# Altium PCB XRACER-R07.pcbdoc (part 2 of 2)
Units mm, origin at the board's own origin, x right, y up, seen from the top; angles counter-clockwise.
Board outline 50.7 x 52.3 mm, 4 copper layers (Top Layer, 2, 3, Bottom Layer); 135 components, 122 nets, 557 pads, 407 vias.
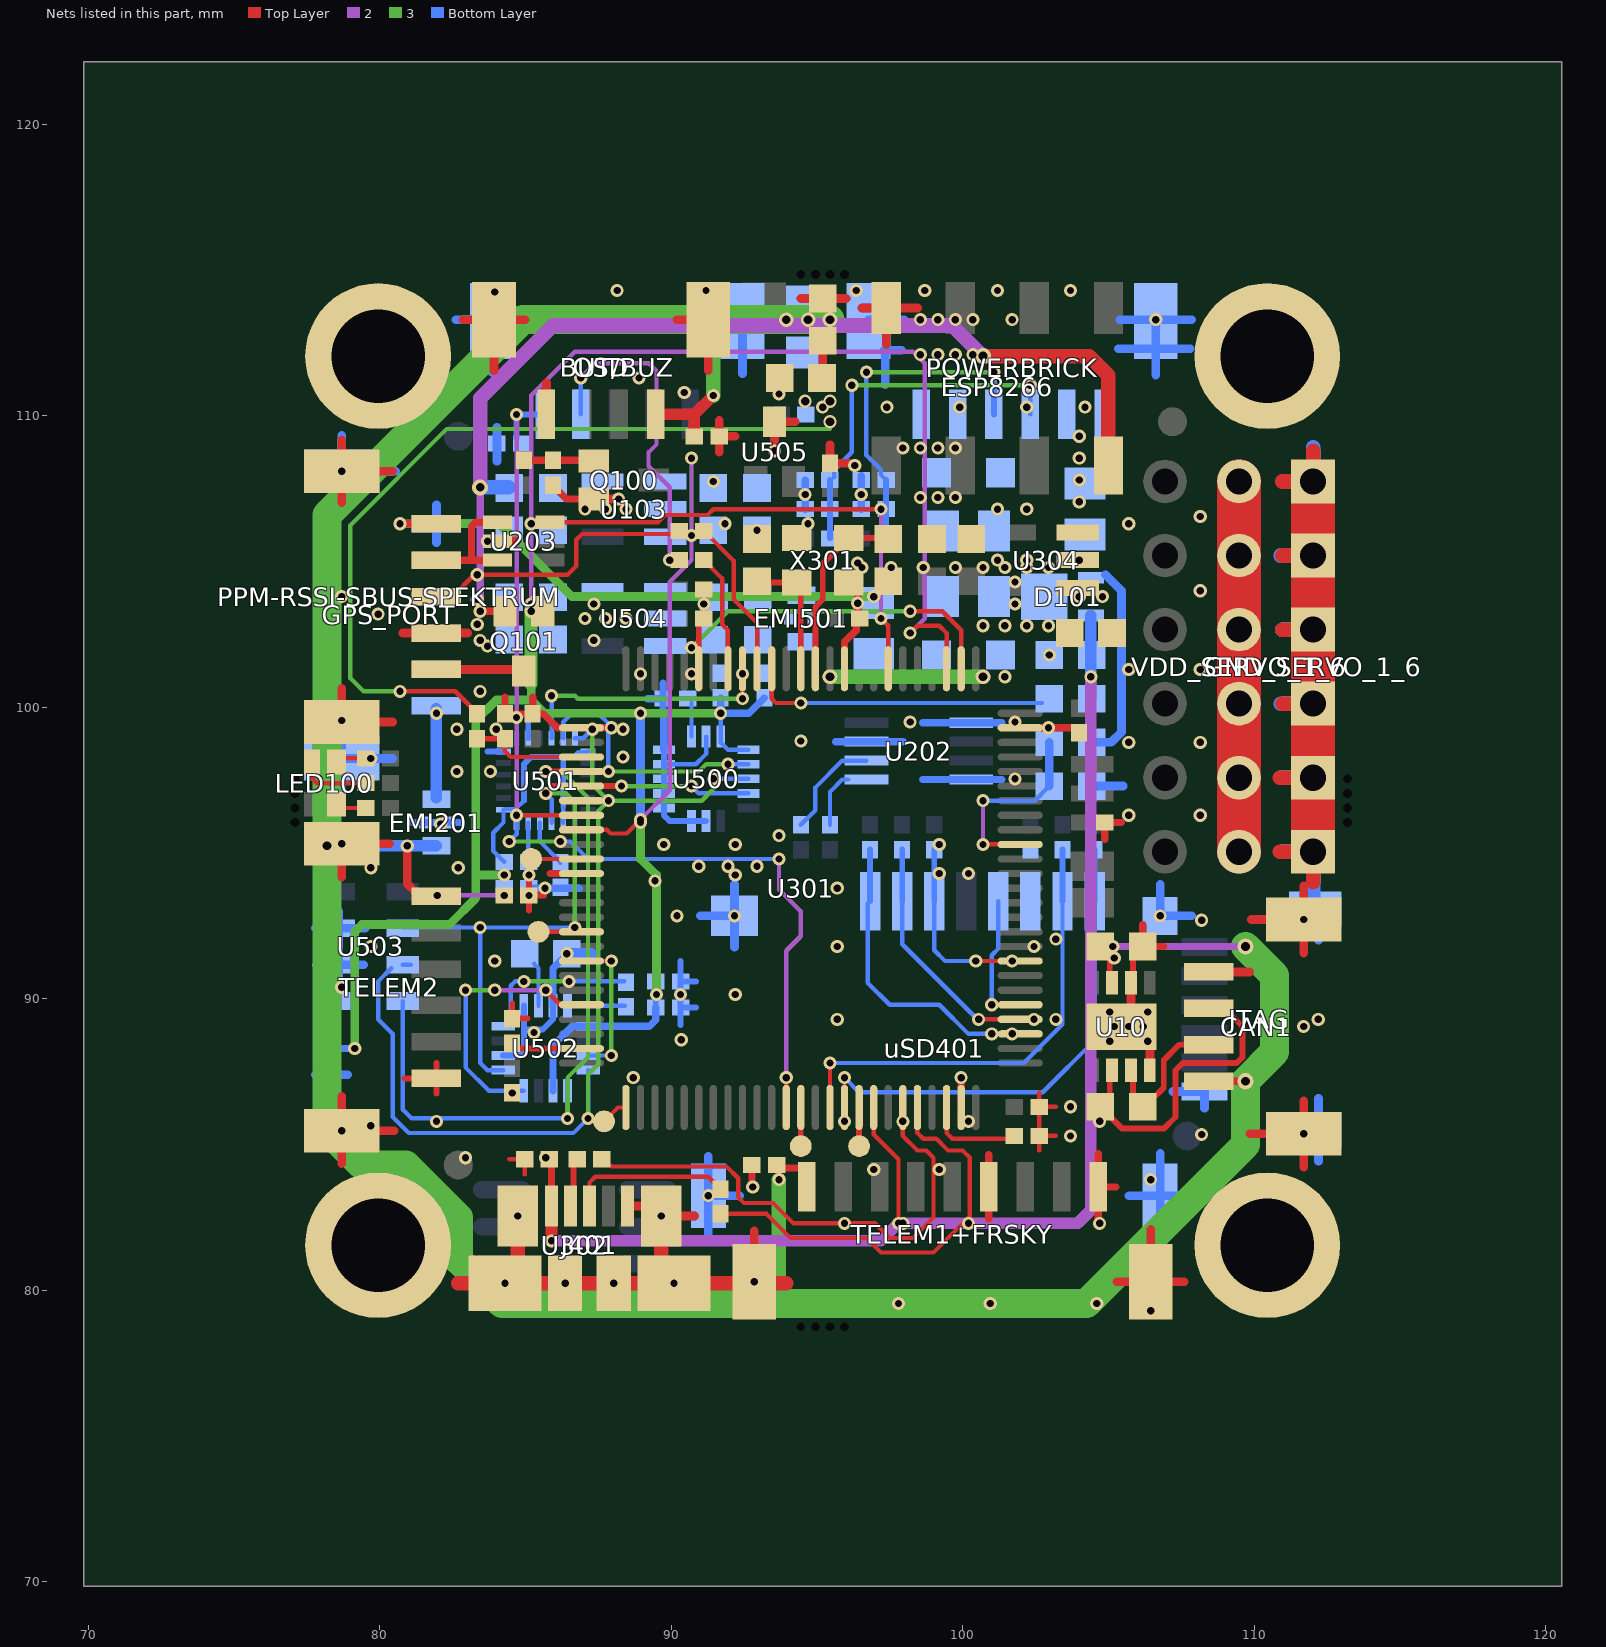
[diagram p4: the nets of this part, all layers, seen from the top]

## Via types
v1: diameter 0.45, hole 0.25, Top Layer to Bottom Layer, 394 vias
v2: diameter 0.5, hole 0.3, Top Layer to Bottom Layer, 5 vias
v3: diameter 0.55, hole 0.3, Top Layer to Bottom Layer, 5 vias
v4: diameter 0.45, hole 0.3, Top Layer to Bottom Layer, 3 vias

## Nets (pads, with @x,y where several pads share a name; then routed paths per layer and width w, separated by ;. In a path a pad name is that pad's centre, name@x,y a point inside that pad or via, vN(x,y) a via of type N, cw(c..) or ccw(c..) an arc to the next point about the centre after c; other vN are vias at no path point) (continued)
GND: BUT/BUZ.GND C103.1 C105.1 C118.1 C119.1 C120.1 C301.1 C302.1 C303.1 C304.2 C305.2 C310.1 C311.1 C312.1 C313.1 C314.1 C315.1 C316.1 C317.1 C318.1 C319.1 C401.1 C402.2 C403.2 C404.1 C405.2 C501.1 C502.1 C503.1 C505.1 C508.1 C509.1 C510.1 C511.1 C520.1 C521.1 C523.1 C524.1 C525.1 C526.1 C601.2 C602.2 C603.2 CAN1.4 CAN1.GND EMI201.3 EMI201.4 EMI501.3 EMI501.4 ESP8266.2 G1.1 G2.1 G3.1 G4.1 GND_SERVO_1_6.1 GND_SERVO_1_6.2 GND_SERVO_1_6.3 GND_SERVO_1_6.4 GND_SERVO_1_6.5 GND_SERVO_1_6.6 GPS_PORT.6 GPS_PORT.GND J401.5 J401.6 J401.7 JTAG.6 JTAG.GND OSD.4 OSD.GND POWERBRICK.1 POWERBRICK.2 POWERBRICK.GND PPM-RSSI-SBUS-SPEKTRUM.4 PPM-RSSI-SBUS-SPEKTRUM.GND Q100.2 R104.1 R105.2 R131.2 R140.1 R301.2 R404.2 R407.2 R408.2 R431.2 TELEM1+FRSKY.6 TELEM1+FRSKY.9 TELEM1+FRSKY.GND TELEM2.6 TELEM2.GND TVS103.1 U10.2 U10.8 U10.EP U103.2 U202.1 U202.4 U202.7 U203.2 U301.10 U301.20 U301.27 U301.37 U301.74 U301.99 U302.4 U304.2 U500.7 U500.8 U500.9 U500.10 U500.11 U500.12 U500.13 U500.15 U501.11 U501.18 U501.20 U502.6 U502.9 U502.11 U503.2 U503.3 U504.2 U505.3 uSD401.6 uSD401.GND X301.2 X301.4 | length 286.2
  Top Layer w0.15: 84.45,84.5 C401.1@84.975,84.5 84.975,83.975 ; 102.625,84.8 C311.1@102.625,86.3 ; C305.2@102.625,85.3 103.2,85.3 ; 102.625,86.8 C311.1@102.625,86.3 ; 103.2,86.3 C311.1@102.625,86.3
  Top Layer w0.2: 80.85,87.275 TELEM2.6@81.95,87.275 ; 81.95,86.75 TELEM2.6@81.95,87.275 ; 81.95,87.8 TELEM2.6@81.95,87.275 ; 84.55,89.85 C304.2@84.55,89.325 85.075,89.325 ; 85.125,93.025 v1(85.125,93.55) ; v1@85.125,94.075 v1(85.125,93.55) ; 85.65,93.55 v1(85.125,93.55) ; U301.20@90.95,101.325 C316.1@90.95,102.9 ; C316.1@91.125,103.05 C315.1@91.125,104.05 ; U10.2@105.85,90.889 C404.1@105.85,91.4
  Top Layer w0.25: 84.3,100.35 R431.2@84.3,99.775 85.625,99.775 86.1,99.3 U301.27@86.925,99.3 v1(87.95,99.3) ; C312.1@85.25,99.775 85.25,100.35 ; 85.85,94.3 U301.37@86.925,94.3 ; R131.2@85.95,107.625 85.95,107.6 86.4,107.15 Q100.2@87.35,107.15 ; v1@92.775,83.7 C603.2@92.775,84.3 ; U301.10@95.95,101.325 95.95,102.25 96.35,102.65 C313.1@96.35,102.8 ; C313.1@96.4,103.25 X301.2@96.4,103.9 ; U301.74@99.95,86.275 v1@99.95,87.25 ; 100.9,82.45 100.9,84.65 ; U301.99@101.975,99.3 C310.1@103.85,99.3 ; v1@104.65,82.4 104.65,84.7 ; TELEM1+FRSKY.9@104.65,83.55 105.25,83.55 ; 104.875,95.475 R301.2@104.875,96.05 105.45,96.05 ; 106.175,92.55 C404.1@106.175,91.8 106.9,91.8
  Top Layer w0.3: 78.7,84.35 78.7,86.65 ; v1(78.7,85.475) 80.5,85.475 ; 78.7,94.175 v1(78.7,95.325) 80.35,95.325 ; 78.7,100.65 PPM-RSSI-SBUS-SPEKTRUM.GND@78.7,99.5 80.45,99.5 ; 78.7,107.025 v1(78.7,108.1) ; 78.7,109.175 v1(78.7,108.1) ; 80.45,108.1 v1(78.7,108.1) ; 80.8,102.55 83.025,102.55 ; 82.85,113.3 OSD.GND@83.925,113.3 ; 83.925,111.55 OSD.GND@83.925,113.3 ; U203.2@84.05,105.7 84.7,105.7 ; 85,113.3 OSD.GND@83.925,113.3 ; OSD.4@85.725,110.05 85.725,111.125 ; Q100.2@87.35,107.15 v1(88.2,107.15) ; J401.5@88.5,82.9 J401.6@89.312,82.9 ; v1(89.663,82.55) 90.8,82.55 ; 90.2,113.3 OSD.GND@91.275,113.3 91.275,111.55 ; 91.65,108.75 91.65,109.85 ; C601.2@91.65,109.3 92.2,109.3 ; v1(92.85,80.3) 92.85,82.05 ; v1@93.55,109 U505.3@93.55,109.8 94.25,109.8 ; 94.45,114.025 96,114.025 ; 95.45,109 C505.1@95.45,108.375 v1@96.1,108.375 ; 96.55,113.7 98.455,113.7 ; 97.38,112.45 ESP8266.2@97.38,113.7 ; 105.3,80.3 TELEM1+FRSKY.GND@106.45,80.3 ; U10.EP@105.775,89.375 U10.2@105.775,90.55 ; U10.8@106.425,87.55 U10.EP@106.425,88.35 ; 106.45,82.1 TELEM1+FRSKY.GND@106.45,80.3 ; 107.6,80.3 TELEM1+FRSKY.GND@106.45,80.3 ; CAN1.4@108.45,90.925 109.85,90.925 ; 109.85,85.375 v1(111.7,85.375) ; 109.9,92.725 v1(111.7,92.725) ; 111.7,84.225 111.7,86.5 ; 111.7,91.575 v1(111.7,92.725) ; 111.7,93.875 v1(111.7,92.725)
  Top Layer w0.5: 82.7,80.25 93.95,80.25 ; J401.7@84.738,80.687 v1(84.738,82.55) ; J401.7@89.663,80.687 v1(89.663,82.55) ; 110.873,95.05 GND_SERVO_1_6.1@112.023,95.05 112.023,94 ; 110.873,97.59 GND_SERVO_1_6.2@112.023,97.59 ; 110.97,100.13 GND_SERVO_1_6.3@112.023,100.13 ; 110.97,102.67 GND_SERVO_1_6.4@112.023,102.67 ; 110.97,105.21 GND_SERVO_1_6.5@112.023,105.21 ; 110.97,107.75 GND_SERVO_1_6.6@112.023,107.75 112.023,108.803
  Top Layer w1.5: GND_SERVO_1_6.1@112.023,95.05 GND_SERVO_1_6.2@112.023,97.59 GND_SERVO_1_6.3@112.023,100.13 GND_SERVO_1_6.4@112.023,102.67 GND_SERVO_1_6.5@112.023,105.21 GND_SERVO_1_6.6@112.023,107.75
  2 w0.3: 110.946,95.05 GND_SERVO_1_6.1@112.023,95.05 112.023,93.973 ; 110.946,97.59 GND_SERVO_1_6.2@112.023,97.59 ; 110.946,100.13 GND_SERVO_1_6.3@112.023,100.13 ; 110.946,102.67 GND_SERVO_1_6.4@112.023,102.67 ; 110.946,105.21 GND_SERVO_1_6.5@112.023,105.21 ; 110.946,107.75 GND_SERVO_1_6.6@112.023,107.75 112.023,108.827
  2 w1.2: GND_SERVO_1_6.1@112.023,95.05 GND_SERVO_1_6.2@112.023,97.59 GND_SERVO_1_6.3@112.023,100.13 GND_SERVO_1_6.4@112.023,102.67 GND_SERVO_1_6.5@112.023,105.21 GND_SERVO_1_6.6@112.023,107.75
  3 w0.3: 110.95,95.05 GND_SERVO_1_6.1@112.023,95.05 112.023,93.977 ; 110.95,97.59 GND_SERVO_1_6.2@112.023,97.59 ; 110.95,100.13 GND_SERVO_1_6.3@112.023,100.13 ; 110.95,102.67 GND_SERVO_1_6.4@112.023,102.67 ; 110.95,105.21 GND_SERVO_1_6.5@112.023,105.21 ; 110.95,107.75 GND_SERVO_1_6.6@112.023,107.75 112.023,108.823
  3 w1.2: GND_SERVO_1_6.1@112.023,95.05 GND_SERVO_1_6.2@112.023,97.59 GND_SERVO_1_6.3@112.023,100.13 GND_SERVO_1_6.4@112.023,102.67 GND_SERVO_1_6.5@112.023,105.21 GND_SERVO_1_6.6@112.023,107.75
  Bottom Layer w0.15: C501.1@85.1,94.725 U501.11@85.1,96.041 ; U500.12@89.752,98.05 90.85,98.05 91.202,98.402 U500.15@91.202,99
  Bottom Layer w0.2: 83.7,98.491 U501.18@84.25,98.491 ; U502.6@84.239,88.059 84.809,88.059 84.95,88.2 U502.9@84.95,89.77 ; 84.95,88.95 85.6,88.95 85.95,89.3 U502.11@85.95,89.77 ; U501.20@85.1,98.941 85.1,99.55 ; U302.4@89.355,79.7 C301.1@90.6,79.7 ; U500.13@89.752,98.55 U500.12@89.752,98.05 U500.11@89.752,97.55 U500.10@89.752,97.05 U500.9@89.752,96.55 89.752,96.298 89.95,96.1 U500.7@91.202,96.1 ; 90.325,89.1 C521.1@90.325,89.7 ; 90.325,91.3 C520.1@90.325,90.6 ; 90.85,89.7 C521.1@90.325,89.7 ; 90.85,90.6 C520.1@90.325,90.6 ; C521.1@90.325,89.7 C520.1@90.325,90.6
  Bottom Layer w0.25: 81.1,96.05 EMI201.4@81.55,96.05 82.8,96.05 ; C502.1@85.125,93.8 86.85,93.8 ; U502.11@85.95,89.77 85.95,91.05 C523.1@86.425,91.525 ; 89.2,100.3 C526.1@89.725,100.3 ; 89.725,99.775 C526.1@89.725,100.3 ; 89.725,100.825 C526.1@89.725,100.3 ; U500.13@89.752,98.55 89.752,99.65 ; C405.2@94.6,106.8 R407.2@94.6,107.8 ; 95.65,98.825 97.975,98.825 ; C403.2@96.525,106.8 R408.2@96.525,107.95 ; 98.625,97.525 101.35,97.525 ; 98.625,99.475 101.35,99.475
  Bottom Layer w0.3: 77.8,87.4 78.9,87.4 ; 77.8,92.425 79.5,92.425 ; 77.825,91.175 79.45,91.175 ; 78.35,86.8 C508.1@78.35,87.375 ; v1@78.6,90.6 78.6,93 ; 78.7,97.1 v1@78.7,99.35 ; GPS_PORT.GND@78.7,98.25 80.45,98.25 ; 78.7,106.875 v1(78.7,108.1) ; 78.7,109.325 v1(78.7,108.1) ; 80.55,108.1 v1(78.7,108.1) ; 81.95,105.65 81.95,106.95 ; GPS_PORT.6@81.95,106.3 83.175,106.3 ; 82.625,113.3 BUT/BUZ.GND@83.85,113.3 ; 83.85,111.5 BUT/BUZ.GND@83.85,113.3 ; 84.025,108.45 84.025,109.6 ; 85.075,113.3 BUT/BUZ.GND@83.85,113.3 ; 87.7,79.645 U302.4@89.2,79.645 ; C301.1@90.8,79.875 91.55,79.875 ; 91,92.85 v1(92.177,92.85) ; 91.225,113.3 92.45,113.3 92.45,111.45 ; 91.277,81.75 v1(91.277,83.25) ; 91.277,84.598 v1(91.277,83.25) ; 92.177,91.777 v1(92.177,92.85) ; 92.177,93.923 v1(92.177,92.85) ; 92.35,83.25 v1(91.277,83.25) ; POWERBRICK.GND@96.775,113.3 98,113.3 ; POWERBRICK.GND@97.3,112.25 97.9,112.25 ; 97.35,111.075 POWERBRICK.GND@97.35,112.3 ; 104.425,96.6 R105.2@104.425,97.3 105.498,97.3 ; 105.35,112.3 107.8,112.3 ; 105.4,113.3 v1(106.625,113.3) ; 105.7,83.25 uSD401.GND@106.777,83.25 ; 106.625,111.4 v1(106.625,113.3) ; 106.777,81.7 uSD401.GND@106.777,83.25 ; 106.777,84.7 uSD401.GND@106.777,83.25 ; 106.777,93.923 v1(106.777,92.85) 107.85,92.85 ; 107.221,86.823 JTAG.6@108.294,86.823 108.294,86.25 ; 107.85,83.25 uSD401.GND@106.777,83.25 ; 107.85,113.3 v1(106.625,113.3) ; 110.9,85.515 JTAG.GND@112.206,85.515 ; 110.985,93.085 112.206,93.085 112.206,92.012 ; 112.206,84.442 JTAG.GND@112.206,85.515 ; 112.206,86.588 JTAG.GND@112.206,85.515
  Bottom Layer w0.4: v1(86.425,91.55) 87.25,91.55
  Bottom Layer w0.5: 110.91,97.59 GND_SERVO_1_6.2@112.023,97.59 ; 110.91,105.21 GND_SERVO_1_6.5@112.023,105.21 ; 110.92,100.13 GND_SERVO_1_6.3@112.023,100.13 ; 110.95,95.05 GND_SERVO_1_6.1@112.023,95.05 JTAG.GND@112.023,93.267 ; 110.97,102.67 GND_SERVO_1_6.4@112.023,102.67 ; 111,107.75 GND_SERVO_1_6.6@112.023,107.75 112.023,108.923
  Bottom Layer w1.5: GND_SERVO_1_6.1@112.023,95.05 GND_SERVO_1_6.2@112.023,97.59 GND_SERVO_1_6.3@112.023,100.13 GND_SERVO_1_6.4@112.023,102.67 GND_SERVO_1_6.5@112.023,105.21 GND_SERVO_1_6.6@112.023,107.75
  other v1: 106.45,79.3 97.8,79.55 100.95,79.55 104.6,79.55 84.3,80.25 86.365,80.25 88.035,80.25 90.1,80.25 95.95,82.3 97.95,82.3 100.2,82.3 104.7,82.3 92.8,83.55 106.45,83.8 96.95,84.15 99.2,84.15 82.95,84.55 85.7,84.55 103.7,85.3 108.2,85.35 79.7,85.65 81.95,85.8 95.95,85.8 97.95,85.8 100.2,85.8 104.7,85.8 103.7,86.3 84.55,86.775 88.7,87.3 99.95,87.3 105.05,88.55 106.35,88.55 90.35,88.6 101.7,88.8 85.3,88.85 105.2,89.05 105.7,89.05 106.2,89.05 111.7,89.05 95.7,89.3 102.45,89.3 103.2,89.3 112.2,89.3 105.05,89.55 106.35,89.55 90.325,90.15 92.2,90.15 78.7,90.4 83.95,91.3 101.7,91.3 105.2,91.4 79.7,91.8 95.7,91.8 102.45,91.8 103.2,92.05 108.2,92.7 90.2,92.85 85.675,93.8 95.7,93.8 89.45,94.05 85.125,94.25 92.2,94.25 99.2,94.3 100.2,94.3 79.7,94.5 82.7,94.5 90.95,94.55 91.95,94.55 92.95,94.55 89.75,95.3 92.2,95.3 99.2,95.3 93.7,95.6 82.1,96 105.7,96.3 108.15,96.3 101.8,97.55 82.65,97.8 83.8,97.8 79.7,98.25 88.35,98.3 105.7,98.8 108.15,98.8 94.45,98.85 82.65,99.25 84,99.25 88.35,99.25 102.95,99.3 98.2,99.5 101.8,99.5 78.7,99.55 84.7,99.65 81.95,99.8 83.45,100.55 88.95,101.15 90.7,101.15 92.45,101.15 105.7,101.3 108.15,101.3 102.975,101.8 83.7,102.1 83.45,102.3 87.35,102.3 83.35,102.85 87.05,103.05 87.75,103.05 88.45,103.05 79.95,103.2 87.35,103.55 91.125,103.55 96.4,103.575 83.35,103.7 78.7,103.8 108.15,104 83.35,104.55 96.55,104.8 97.55,104.8 98.65,104.8 99.75,104.8 96.4,104.95 101.2,105.05 102.2,105.05 104,105.05 83.7,105.7 92.95,106.078 85.2,106.3 91.85,106.3 94.7,106.3 108.15,106.55 87.05,106.8 87.75,106.8 88.45,106.8 101.2,106.8 102.2,106.8 104,107.05 98.55,107.2 99.15,107.2 99.75,107.2 94.6,107.3 96.525,107.3 91.45,107.75 104,107.8 96.3,108.3 104,108.55 93.55,108.8 97.95,108.9 98.55,108.9 99.15,108.9 99.75,108.9 104,109.3 95.2,110.3 97.4,110.3 99.9,110.3 102.2,110.3 104.2,110.3 90.45,110.8 88.9,111.3 98.55,112.1 99.15,112.1 99.75,112.1 100.35,112.1 98.55,113.3 99.15,113.3 99.75,113.3 100.35,113.3 101.7,113.3 83.95,114.25 88.15,114.3 91.2,114.3 96.35,114.3 98.7,114.3 101.2,114.3 103.7,114.3
HMC5983_CS: U301.46 U502.4 | length 9.2
  Top Layer w0.15: v1(85.7,90.3) 86.2,89.8 U301.46@86.925,89.8
  2 w0.15: v1(83.95,90.3) v1(85.7,90.3)
  3 w0.15: v1(82.95,90.3) v1(83.95,90.3)
  Bottom Layer w0.15: v1(82.95,90.3) 82.95,87.65 83.751,86.849 U502.4@84.95,86.849
HMC5983_DRDY: U301.43 U502.15 | length 5.1
  Top Layer w0.15: U301.43@86.925,91.3 v1(87.95,91.3)
  3 w0.15: v1(87.95,88.059) v1(87.95,91.3)
  Bottom Layer w0.15: U502.15@87.16,88.059 v1(87.95,88.059)
LED_SAFETY: R403.2 U301.18 | length 4.1
  Top Layer w0.15: R403.2@91.125,105.05 91.75,104.425 91.75,102.85 91.95,102.65 U301.18@91.95,101.325
MPU9250_CS: U301.17 U501.22 | length 9.1
  Top Layer w0.15: v1(92.45,100.3) U301.17@92.45,101.325
  3 w0.15: v1(85.9,100.4) 86.7,100.4 86.8,100.3 v1(92.45,100.3)
  Bottom Layer w0.15: U501.22@85.9,98.941 v1(85.9,100.4)
MPU9250_DRDY: U301.62 U501.12 | length 19.3
  Top Layer w0.15: U301.62@93.95,86.275 v1(93.95,87.3)
  2 w0.15: v1(93.7,94.8) 93.7,93.75 94.45,93 94.45,92.15 93.95,91.65 v1(93.95,87.3)
  3 w0.15: v1(84.45,95.4) v1(86.2,95.4)
  Bottom Layer w0.15: v1(84.45,95.4) 84.7,95.65 U501.12@84.7,96.041 ; v1(86.2,95.4) 86.55,95.4 87.15,94.8 v1(93.7,94.8)
MPU9250_MISO: U301.31 U500.4 U501.9 U502.5 U503.6 | length 25.3
  Top Layer w0.2: v1(85.7,97.05) 85.95,97.3 v1(88.3,97.3)
  3 w0.15: v1(85.7,97.05) 86.4,97.05 86.7,96.75 v1(86.7,92.45) ; v1(88.3,97.3) v1(90.7,97.3)
  Bottom Layer w0.15: U503.6@80.8,92.45 U503.6@80.8,92.65 ; U503.6@80.825,92.45 v1(86.7,92.45) ; v1(83.45,92.45) 83.45,87.8 83.691,87.559 U502.5@84.239,87.559 ; v1(85.7,97.05) 85.9,96.85 U501.9@85.9,96.041 ; v1(90.7,97.3) 90.95,97.05 U500.4@92.652,97.05
MPU9250_MOSI: U301.32 U500.3 U501.24 U502.16 U503.7 | length 35.4
  Top Layer w0.15: U301.32@86.925,96.8 v1(87.85,96.8)
  3 w0.15: v1(87.15,85.9) 87.15,87.4 87.5,87.75 87.5,96.45 v1(87.85,96.8) ; v1(87.3,99.25) 87.3,97.35 v1(87.85,96.8) ; v1(91.45,97.55) 91.45,97.2 91.05,96.8 v1(87.85,96.8)
  Bottom Layer w0.15: U503.7@80.4,91.05 79.95,90.6 79.95,89.3 80.45,88.8 80.45,85.95 81,85.4 86.65,85.4 v1(87.15,85.9) ; U503.7@80.8,91.175 U503.7@81.075,91.175 ; U501.24@86.7,98.941 86.991,98.941 v1(87.3,99.25) ; v1@87.16,85.91 U502.16@87.16,87.559 ; v1(91.45,97.55) U500.3@92.652,97.55
MPU9250_SCK: U301.30 U500.2 U501.23 U502.1 U503.8 | length 34.6
  Top Layer w0.2: v1(85.7,97.8) v1(87.85,97.8)
  3 w0.15: v1(85.7,97.8) 86.25,97.8 87.15,96.9 87.15,88 86.45,87.3 v1(86.45,85.9) ; v1(87.85,97.8) 90.95,97.8 91.2,98.05 v1(91.95,98.05)
  Bottom Layer w0.15: U503.8@80.8,89.925 80.8,86.2 81.1,85.9 v1(86.45,85.9) U502.1@86.45,86.849 ; U501.23@86.3,98.941 86.3,99.5 86.55,99.75 87.55,99.75 87.85,99.45 v1(87.85,97.8) ; v1(91.95,98.05) U500.2@92.652,98.05
NETA8_1: A8.1 U301.67 | length 1.3
  Top Layer w0.2: A8.1@96.45,84.95 U301.67@96.45,86.275
NETB1_1: B1.1 U301.36 | length 1.7
  Top Layer w0.15: B1.1@85.2,94.8 U301.36@86.925,94.8
NETB12_1: B12.1 U301.51 | length 0.9
  Top Layer w0.15: B12.1@87.7,85.8 88.175,86.275 U301.51@88.45,86.275
NETBUT/BUZ_2: BUT/BUZ.2 R403.1 | length 11.1
  2 w0.15: v1(86.9,111.3) 87.4,111.8 89.25,111.8 89.5,111.55 89.5,109.022 89.225,108.747 89.225,108.275 89.95,107.55 v1(89.95,105.05)
  Bottom Layer w0.15: BUT/BUZ.2@86.9,110.05 v1(86.9,111.3)
NETC6_1: C6.1 U301.63 | length 1.3
  Top Layer w0.2: C6.1@94.45,84.95 U301.63@94.45,86.275
NETC103_2: C103.2 D101.2 FR102.2 R103.1 TVS103.2 | length 6.8
  Bottom Layer w0.3: R103.1@104.425,98.8 105.1,98.8 105.45,99.15 105.45,104 104.9,104.55
NETC304_1: C304.1 U301.49 | length 2.5
  Top Layer w0.2: C304.1@84.45,88.3 U301.49@86.925,88.3
NETC305_1: C305.1 U301.73 | length 3.2
  Top Layer w0.15: U301.73@99.45,86.275 99.45,85.4 99.65,85.2 C305.1@101.675,85.2
NETC403_1: C403.1 POWERBRICK.3 R408.1 R422.2 | length 11.8
  3 w0.15: v1(96.7,111.5) v1(101.075,111.5)
  Bottom Layer w0.15: v1(96.7,111.5) 96.7,108.65 96.85,108.5 97.2,108.15 97.2,107.975 R408.1@97.375,107.8
  Bottom Layer w0.2: R422.2@97.375,105.8 C403.1@97.375,106.8 R408.1@97.375,107.8 ; POWERBRICK.3@101.075,110.05 v1(101.075,111.5)
NETC405_1: C405.1 POWERBRICK.4 R407.1 R423.2 | length 12.5
  3 w0.15: v1(96.2,111.05) v1(102.325,111.05)
  Bottom Layer w0.15: R407.1@95.6,107.9 95.6,108.15 96.2,108.75 v1(96.2,111.05) ; POWERBRICK.4@102.325,110.05 v1(102.325,111.05)
  Bottom Layer w0.2: R423.2@95.45,105.8 C405.1@95.45,106.8 R407.1@95.45,107.8
NETC503_2: C503.2 U501.10 | length 1.7
  Bottom Layer w0.15: U501.10@85.5,96.041 85.5,95.4 86.2,94.7 C503.2@86.2,94.675
NETC509_2: C509.2 EMI501.2 R501.2 U504.1
NETC522_1: C522.1 U502.12 | length 2
  Bottom Layer w0.15: U502.12@86.45,89.77 C522.1@88.405,89.77
NETC522_2: C522.2 U502.8 | length 5.3
  3 w0.15: v1(84.95,90.6) v1(86.5,90.6)
  Bottom Layer w0.15: U502.8@84.5,89.1 84.5,90.45 84.65,90.6 v1(84.95,90.6) ; v1(86.5,90.6) C522.2@88.4,90.6
NETC523_2: C523.2 U502.10 | length 1.5
  Bottom Layer w0.15: C523.2@85.3,91.2 85.45,91.05 U502.10@85.45,89.77
NETC526_2: C526.2 U500.14 | length 1.2
  Bottom Layer w0.15: U500.14@90.702,99 C526.2@90.702,100.173
NETCAN1_2: CAN1.2 R405.1 U10.7 | length 3.8
  Top Layer w0.2: R405.1@105.85,86.739 U10.7@105.85,87.25 ; R405.1@106.5,86.55 106.9,86.95 106.9,87.9 107.425,88.425 CAN1.2@108.45,88.425
NETCAN1_3: CAN1.3 R405.2 U10.6 | length 9.3
  Top Layer w0.2: R405.2@104.725,86.3 105.475,85.55 106.9,85.55 107.3,85.95 107.3,87.55 107.55,87.8 109.4,87.8 109.6,88 109.6,89.05 CAN1.3@109.15,89.5 ; R405.2@105.05,86.739 U10.6@105.05,87.25
NETD102_2: D102.2 FR106.1
NETE10_1: E10.1 U301.41 | length 1.5
  Top Layer w0.15: E10.1@85.45,92.3 U301.41@86.925,92.3
NETEMI201_2: EMI201.2 GPS_PORT.1 | length 3.1
  Bottom Layer w0.4: EMI201.2@81.95,96.9 GPS_PORT.1@81.95,99.95
NETJ401_2: J401.2 R441.1 | length 1
  Top Layer w0.2: J401.2@86.65,83.45 R441.1@86.65,84.475
NETJ401_3: J401.3 R442.1 | length 5.6
  Top Layer w0.15: J401.3@87.2,82.9 87.2,83.7 87.4,83.9 91.275,83.9 R442.1@91.7,83.475
NETLED100_1: LED100.1 R115.2 | length 2.5
  Top Layer w0.15: LED100.1@77.675,98.125 77.675,97.575 77.85,97.4 R115.2@79.525,97.4
NETLED100_2: LED100.2 R114.2 | length 0.9
  Top Layer w0.15: LED100.2@78.65,98.25 R114.2@79.525,98.25
NETLED100_3: LED100.3 R113.2 | length 0.9
  Top Layer w0.15: LED100.3@78.65,96.55 R113.2@79.525,96.55
"NETPOWER LED_2": "POWER LED.2" R140.2 | length 1.3
  Top Layer w0.3: 95.2,111.325 R140.2@95.2,112.575
NETPPM-RSSI-SBUS-SPEKTRUM_3: PPM-RSSI-SBUS-SPEKTRUM.3 R201.1 | length 9.8
  Top Layer w0.15: PPM-RSSI-SBUS-SPEKTRUM.3@81.95,103.8 82.5,103.8 83.25,104.55 86.45,104.55 86.75,104.85 86.75,105.75 86.95,105.95 90.175,105.95 R201.1@90.275,106.05
NETQ100_3: Q100.3 R130.1 R131.1 | length 2.4
  Top Layer w0.25: R130.1@84.95,108.475 R131.1@85.95,108.475 Q100.3@87.325,108.475
NETR452_2: R452.2 U202.6 | length 3.6
  Bottom Layer w0.15: R452.2@94.45,95.975 94.95,96.475 94.95,97.25 95.875,98.175 U202.6@96.7,98.175
NETR454_2: R454.2 U202.5 | length 1.9
  Bottom Layer w0.15: R454.2@95.45,95.975 95.45,97.1 95.875,97.525 U202.5@96.075,97.525
OSC_IN: C302.2 U301.12 X301.3 | length 6.3
  Top Layer w0.2: U301.12@94.95,101.325 94.95,103.45 95.2,103.7 95.2,104.923 X301.3@96.089,105.812 C302.2@97.413,105.812
OSC_OUT: C303.2 U301.13 X301.1 | length 4.1
  Top Layer w0.2: C303.2@92.987,104.288 X301.1@94.311,104.288 ; U301.13@94.45,101.325 X301.1@94.45,104.149
OTG_FS_DM: R441.2 U301.70 | length 17.5
  Top Layer w0.15: R441.2@87.625,84.5 87.7,84.5 87.95,84.25 91.9,84.25 92.3,83.85 92.3,83.2 92.5,83 93.5,83 94.2,82.3 97,82.3 97.5,81.8 98.3,81.8 99,82.5 99,84.55 98.75,84.8 98.45,84.8 97.95,85.3 U301.70@97.95,86.275
OTG_FS_DP: R442.2 U301.71 | length 14.6
  Top Layer w0.15: R442.2@91.7,82.625 93.275,82.625 94.1,81.8 96.7,81.8 97.2,81.3 99,81.3 100.25,82.55 100.25,84.55 100,84.8 99.5,84.8 99.1,85.2 98.65,85.2 98.45,85.4 U301.71@98.45,86.275
PERIPH_3V3_EN: R118.1 U103.3 U301.34 | length 18.3
  Top Layer w0.15: U301.34@86.925,95.8 87.8,95.8 87.925,95.675 88.475,95.675 v1(88.95,96.15)
  2 w0.15: v1(88.95,96.15) 89.95,97.15 ; 89.95,97.45 89.95,97.15 ; v1(90.7,108.55) 90.7,105.05 89.95,104.3 89.95,97.15
  3 w0.15: v1(90.7,105.9) v1(90.7,108.55)
RC_INPUT: PPM-RSSI-SBUS-SPEKTRUM.2 U203.1 U203.3 | length 4.2
  Top Layer w0.25: PPM-RSSI-SBUS-SPEKTRUM.2@81.95,105.05 83.15,105.05 ; U203.3@84.05,105.05 83.15,105.05 ; U203.1@84.05,106.35 83.3,106.35 83.15,106.2 83.15,105.05
RSSI_IN: R201.2 U301.16 | length 5.5
  Top Layer w0.15: R201.2@91.125,106.05 92.15,105.025 92.15,103.7 92.95,102.9 U301.16@92.95,101.325
SAFETY_SWITCH_IN: BUT/BUZ.1 R404.1 U301.33 | length 17.8
  Top Layer w0.15: v1(84.7,96.3) U301.33@86.925,96.3
  2 w0.15: v1(84.7,96.3) v1(84.7,110.05)
  Bottom Layer w0.2: R404.1@84.7,109.225 v1(84.7,110.05) BUT/BUZ.1@85.65,110.05
SBUS_INV: U203.6 U301.7 | length 17.1
  Top Layer w0.15: U203.6@85.85,106.35 89.55,106.35 89.8,106.6 91.25,106.6 91.45,106.8 v1(97.2,106.8) ; v1(97.2,103.05) 97.45,102.8 U301.7@97.45,101.325
  2 w0.15: v1(97.2,103.05) v1(97.2,106.8)
SDIO_CK: U301.80 uSD401.5 | length 4.6
  Top Layer w0.15: v1(101,89.8) U301.80@101.975,89.8
  Bottom Layer w0.15: v1@100.95,89.8 101,89.85 101,91.5 101.227,91.727 uSD401.5@101.227,93.35
SDIO_CMD: R411.1 U301.83 uSD401.3 | length 6.6
  Top Layer w0.15: v1(100.45,91.3) U301.83@101.975,91.3
  Bottom Layer w0.15: uSD401.3@99.027,93.35 99.027,91.673 99.4,91.3 v1(100.45,91.3)
  Bottom Layer w0.2: uSD401.3@99.027,93.35 R411.1@99.027,95.125
SDIO_D0: R410.1 U301.65 uSD401.7 | length 16
  Top Layer w0.15: U301.65@95.45,86.275 v1(95.45,87.8)
  Bottom Layer w0.15: v1(95.45,87.8) 100.1,87.8 102.1,87.8 103.427,89.127 uSD401.7@103.427,93.35
  Bottom Layer w0.2: uSD401.7@103.427,93.35 R410.1@103.427,95.125
SDIO_D1: R401.1 U301.66 uSD401.8 | length 17.1
  Top Layer w0.15: U301.66@95.95,86.275 v1(95.95,87.3)
  Bottom Layer w0.15: v1(95.95,87.3) 96.45,86.8 102.75,86.8 104.527,88.577 uSD401.8@104.527,93.35
  Bottom Layer w0.2: uSD401.8@104.527,93.35 R401.1@104.527,95.125
SDIO_D2: R413.1 U301.78 uSD401.1 | length 10.6
  Top Layer w0.15: v1(101,88.8) U301.78@101.975,88.8
  Bottom Layer w0.15: uSD401.1@96.827,93.35 96.75,93.273 96.75,90.55 97.5,89.8 99.2,89.8 100.2,88.8 v1(101,88.8)
  Bottom Layer w0.2: uSD401.1@96.827,93.35 R413.1@96.827,95.125
SDIO_D3: R412.1 U301.79 uSD401.2 | length 8.3
  Top Layer w0.15: v1(100.55,89.3) U301.79@101.975,89.3
  Bottom Layer w0.15: uSD401.2@97.927,93.35 97.927,91.873 100.45,89.35 v1@100.45,89.3
  Bottom Layer w0.2: uSD401.2@97.927,93.35 R412.1@97.927,95.125
SPEKTRUM_POWER: Q101.3 U301.3 | length 33.8
  Top Layer w0.15: v1(98.2,102.55) 98.45,102.8 99.2,102.8 99.45,102.55 U301.3@99.45,101.325
  2 w0.15: v1(85.2,103.3) 85.2,110.7 86.7,112.2 98.3,112.2 98.7,111.8 98.7,103.05 v1(98.2,102.55)
VBUS: C401.2 D101.1 J401.1 R102.2 R104.2 U301.68 | length 47.1
  Top Layer w0.15: U301.68@96.95,86.275 96.95,85.35 97.8,84.5 v1(97.8,82.3)
  Top Layer w0.25: J401.1@85.9,82.9 C401.2@85.9,84.425
  Top Layer w0.4: v1(85.9,81.7) J401.1@85.9,82.9
  2 w0.4: v1(85.9,81.7) 97.2,81.7 v1(97.8,82.3) 103.95,82.3 104.4,82.75 v1(104.4,101.05)
  Bottom Layer w0.4: R102.2@104.4,100.3 D101.1@104.4,103.15
VBUS_VALID: R102.1 U301.15 | length 10.4
  Top Layer w0.15: U301.15@93.45,101.325 93.45,100.3 93.6,100.15 v1(94.45,100.15)
  Bottom Layer w0.15: v1(94.45,100.15) R102.1@102.725,100.15
VDD_3V3: C119.2 C120.2 ESP8266.7 Q101.2 U103.5 | length 35.5
  Top Layer w0.25: v1(83.45,103.3) Q101.2@84.3,103.3
  Top Layer w0.5: v3(100.7,112.05) 104.35,112.05 105,111.4 ESP8266.7@105,108.3
  2 w0.25: v1(83.45,103.3) v3(83.45,107.55)
  2 w0.5: v3(83.45,107.55) 83.45,110.6 85.95,113.1 99.65,113.1 v3(100.7,112.05)
  Bottom Layer w0.5: v3(83.45,107.55) C119.2@84.428,107.55
VDD_3V3_SENSORS: C501.2 C502.2 C508.2 C510.2 C511.2 C520.2 C521.2 C524.2 C525.2 U500.1 U500.16 U501.1 U501.8 U501.13 U502.2 U502.13 U503.1 U504.5 | length 59.8
  3 w0.3: v1(79.15,88.3) 79.15,92.3 79.4,92.55 82.4,92.55 83.3,93.45 83.3,94.25 ; v1(84.275,94.25) 83.3,94.25 ; 85.2,100.8 85.2,100.25 ; v1(88.95,96.05) 88.95,94.8 89.5,94.25 v1(89.5,90.15) ; v1(91.7,99.8) v1(88.95,99.8) 85.65,99.8 85.2,100.25 ; 83.3,94.25 83.3,99.55 84,100.25 85.2,100.25
  3 w0.45: 85.2,100.8 v1(85.2,103.55)
  Bottom Layer w0.15: C501.2@84.275,94.7 83.9,95.075 83.9,95.7 84.25,96.05 U501.13@84.25,96.491 84.275,96.516 84.666,96.516 84.95,96.8 ; U501.8@86.3,96.041 86.3,96.6 ; 86.65,98.3 86.816,98.466 87.125,98.466 U501.1@87.15,98.491 ; v1(91.7,99.8) 91.7,98.8 91.95,98.55 U500.1@92.652,98.55 ; C525.2@91.7,100.325 C525.2@91.702,100.325
  Bottom Layer w0.2: 84.95,96.8 84.95,98.05 85.2,98.3 86.65,98.3 ; 86.3,96.6 86.3,98.3 ; C521.2@89.475,89.7 C520.2@89.475,90.6 C520.2@89.475,90.7
  Bottom Layer w0.25: C508.2@78.35,88.3 U503.1@78.35,89.675 ; C508.2@78.425,88.3 v1(79.15,88.3) ; U502.2@85.95,86.849 85.95,88.4 86.609,89.059 U502.13@87.16,89.059 89.259,89.059 89.475,89.275 C521.2@89.475,89.7 ; C525.2@91.702,100.325 91.702,99.8 92.675,99.8 C524.2@93.2,100.325
  Bottom Layer w0.3: v1(88.95,96.05) v1(88.95,99.8)
VDD_3V3_SENSORS_EN: R501.1 U301.2 U504.3 | length 11.4
  Top Layer w0.15: v1(98.2,103.3) 99.3,103.3 99.95,102.65 U301.2@99.95,101.325
  3 w0.15: v1(90.7,102.05) 91.95,103.3 v1(98.2,103.3)
VDD_3V3_SPEKTRUM: PPM-RSSI-SBUS-SPEKTRUM.5 Q101.1 | length 3
  Top Layer w0.3: PPM-RSSI-SBUS-SPEKTRUM.5@81.95,101.3 Q101.1@84.95,101.3
VDD_5V_BRICK: FR102.1 POWERBRICK.5 POWERBRICK.6
VDD_5V_IN: "POWER LED.1" C105.2 C118.2 C317.2 D101.3 D102.1 EMI501.1 FR101.1 R118.2 R132.2 R430.2 U103.1 U304.1 U304.3 | length 33.2
  Top Layer w0.15: v1(80.7,100.55) 82.6,100.55 83.35,99.8 R430.2@83.35,99.775
  3 w0.15: v1(80.7,100.55) 79.45,100.55 79,101 79,106.25 82.3,109.55 95.45,109.55
  3 w0.5: v2(95.45,101.05) v2(100.7,101.05)
  other v1: 101.45,101.05 100.7,102.8 101.45,102.8 102.2,102.8 102.95,102.8 101.8,103.55 104,103.8 104.8,103.8 101.8,104.3 100.7,104.8 101.45,104.8 102.2,104.8 102.95,104.8 105.7,106.3 93.7,110.75
  other v4: 95.45,109.8 94.6,110.5 95.45,110.5
VDD_5V_PERIPH: C404.2 C601.1 C602.1 C603.1 CAN1.1 EMI201.1 FR101.2 OSD.1 TELEM1+FRSKY.1 TELEM2.1 U10.3 | length 110.8
  Top Layer w0.2: U10.3@105.05,90.85 C404.2@105.05,91.361
  Top Layer w0.25: C603.1@93.675,84.2 TELEM1+FRSKY.1@94.45,84.2 ; v1(93.7,83.8) C603.1@93.7,84.2 ; CAN1.1@108.45,87.175 v3(109.7,87.175)
  Top Layer w0.3: v1(80.95,95.25) 80.95,93.95 TELEM2.1@81.3,93.6
  Top Layer w0.4: OSD.1@89.475,110.05 90.8,110.05 ; C601.1@90.8,109.3 90.8,110.05 ; v1(91.45,110.7) 90.8,110.05
  2 w0.15: v1(81.975,93.55) v1(84.275,93.55)
  2 w0.25: v1(105.15,91.8) v3(109.7,91.8)
  3 w0.5: v1(91.45,110.7) 91.45,113.05 ; 93.7,79.55 v1(93.7,83.8)
  3 w1: v2(95.45,113.3) 84.9,113.3 78.2,106.6 78.2,85.5 79.4,84.3 80.9,84.3 82.7,82.5 82.7,81.05 84.2,79.55 104.25,79.55 109.7,85 v3(109.7,87.175) 110.7,88.175 110.7,90.8 v3(109.7,91.8)
  Bottom Layer w0.4: v3(78.2,95.25) EMI201.1@81.95,95.25
  other v2: 93.95,113.3 94.7,113.3
VDD_5V_RECEIVER: FR106.2 PPM-RSSI-SBUS-SPEKTRUM.1 | length 18.5
  Top Layer w0.25: v1(80.7,106.3) PPM-RSSI-SBUS-SPEKTRUM.1@81.95,106.3
  3 w0.3: v1(80.7,106.3) 84.1,106.3 86.6,103.8 v1(96.95,103.8)
VDD_5V_SENS: R430.1 R431.1 U301.29 | length 4.1
  Top Layer w0.15: R431.1@84.3,98.925 84.3,98.5 84.5,98.3 U301.29@86.925,98.3
  Top Layer w0.2: R430.1@83.35,98.925 R431.1@84.3,98.925
VDD_BRICK_VALID: R103.2 R105.1 U301.91 | length 6.8
  Top Layer w0.15: v1(100.7,95.3) U301.91@101.975,95.3
  2 w0.15: v1(100.7,95.3) v1(100.7,96.8)
  Bottom Layer w0.15: v1(100.7,96.8) 102.475,96.8 R105.1@102.975,97.3
  Bottom Layer w0.3: R105.1@102.975,97.3 R103.2@102.975,98.8
VDD_SERVO: VDD_SERVO_1_6.1 VDD_SERVO_1_6.2 VDD_SERVO_1_6.3 VDD_SERVO_1_6.4 VDD_SERVO_1_6.5 VDD_SERVO_1_6.6 | length 50.8
  Top Layer w1.5: VDD_SERVO_1_6.1@109.483,95.05 VDD_SERVO_1_6.2@109.483,97.59 VDD_SERVO_1_6.3@109.483,100.13 VDD_SERVO_1_6.4@109.483,102.67 VDD_SERVO_1_6.5@109.483,105.21 VDD_SERVO_1_6.6@109.483,107.75
  2 w1.2: VDD_SERVO_1_6.1@109.483,95.05 VDD_SERVO_1_6.6@109.483,107.75
  3 w1.2: VDD_SERVO_1_6.1@109.483,95.05 VDD_SERVO_1_6.2@109.483,97.59 VDD_SERVO_1_6.3@109.483,100.13 VDD_SERVO_1_6.4@109.483,102.67 VDD_SERVO_1_6.5@109.483,105.21 VDD_SERVO_1_6.6@109.483,107.75
  Bottom Layer w1.5: VDD_SERVO_1_6.1@109.483,95.05 VDD_SERVO_1_6.2@109.483,97.59 VDD_SERVO_1_6.3@109.483,100.13 VDD_SERVO_1_6.4@109.483,102.67 VDD_SERVO_1_6.5@109.483,105.21 VDD_SERVO_1_6.6@109.483,107.75
pads on no net: J401.4 p1.1 p2.1 p3.1 p4.1 U103.4 U301.69 U301.90 U304.4 U501.2 U501.3 U501.4 U501.5 U501.6 U501.7 U501.14 U501.15 U501.16 U501.17 U501.19 U501.21 U502.3 U502.7 U502.14 U503.4 U504.4 uSD401.9

## Polygon pours and split planes (outlines as drawn)
VDD_5V_IN on Bottom Layer (solid, remove dead copper, pour order 360): 93.7,112.8 95.8,112.8 95.8,108.8 94.65,108.8 93.95,108.1 93.95,107.05 93.2,107.05 93.2,109.55 94.15,109.55 94.3,109.7 94.3,110.45 94.2,110.55 93.7,110.55
NETD102_2 on Bottom Layer (solid, pour order 332): 100.2,102.8 100.2,100.8 96.2,100.8 96.2,102.8
VDD_5V_IN on Bottom Layer (solid, pour order 356): 103.6,102.55 102.4,102.55 102.2,102.35 102.2,100.8 100.45,100.8 100.45,105.05 103.6,105.05
VDD_5V_BRICK on Bottom Layer (solid, pour order 420): 103.2,110.9 103.2,106.8 105.2,106.8 105.2,110.9
VDD_3V3 on Bottom Layer (solid, pour order 444): 88.4,108.05 88.4,107.3 86.8,107.3 86.7,107.2 86.7,107.05 83.95,107.05 83.95,108.05
PERIPH_3V3_EN on Bottom Layer (solid, pour order 472): 89.05,106.3 90.65,106.3 90.75,106.4 90.75,106.55 91.95,106.55 91.95,105.55 89.05,105.55
VDD_3V3_SENSORS_EN on Bottom Layer (solid, pour order 484): 89.05,102.4 90.6,102.4 90.75,102.55 90.75,102.8 91.95,102.8 91.95,101.8 89.05,101.803
GND on Bottom Layer (solid, pour order 500): 90.55,107.1 86.9,107.1 86.9,106.95 86.75,106.8 83.95,106.8 83.95,105.55 86.7,105.55 86.7,106.15 86.9,106.35 88.85,106.35 89,106.5 90.55,106.5
VDD_3V3_SENSORS on Bottom Layer (solid, pour order 464): 88.4,104.3 88.4,103.7 86.85,103.7 86.45,103.3 83.95,103.3 83.95,104.3
GND on Bottom Layer (solid, pour order 408): 83.95,103.1 86.55,103.1 86.95,103.5 90.55,103.5 90.55,102.6 86.85,102.6 86.7,102.45 86.7,101.8 83.95,101.8
NETC103_2 on Bottom Layer (solid, pour order 368): 105.2,104.25 103.95,104.25 103.95,105.2 103.8,105.35 100.45,105.35 100.45,108.8 102.95,108.8 102.95,106.7 103.15,106.5 105.2,106.5
NETC509_2 on Bottom Layer (solid, pour order 440): 89.05,103.7 90.6,103.7 90.75,103.55 90.75,103.3 93.45,103.3 93.7,103.55 95.7,103.55 95.7,104.3 89.05,104.3
VDD_5V_IN on Bottom Layer (solid, pour order 404): 93.95,102.65 93.95,100.8 95.7,100.8 95.7,102.65
GND on Bottom Layer (solid, remove dead copper, pour order 124): 95.7,103.35 93.8,103.35 93.55,103.1 92.2,103.1 92.2,101.7 92.1,101.6 89.05,101.6 89.05,100.8 93.75,100.8 93.75,102.7 93.9,102.85 95.7,102.85
GND on Bottom Layer (solid, pour order 384): 100.2,110.9 98.2,110.9 98.2,103.05 100.2,103.05
VDD_5V_PERIPH on Bottom Layer (solid, remove dead copper, pour order 148): 93.7,114.55 95.7,114.55 95.7,113.05 93.7,113.05
VDD_5V_IN on Bottom Layer (solid, pour order 296): 89.05,108.05 89.05,107.3 90.65,107.3 90.75,107.2 90.75,107.05 93.45,107.05 93.45,109.55 91.2,109.55 91.2,108.3 90.95,108.05
GND on Bottom Layer (solid, remove dead copper, pour order 164): 77.2,114.797 113.2,114.797 113.2,78.797 77.2,78.797
VDD_5V_IN on Top Layer (solid, pour order 452): 102.9,104.4 104.775,104.4 104.925,104.55 104.925,105.55 104.775,105.7 103.2,105.7 103.2,106.6 106.95,106.6 106.95,101.8 104.65,101.8 104.65,103.3 104.45,103.5 102.9,103.5
FMU_VDD_3V3 on Top Layer (solid, remove dead copper, pour order 264): 87.95,88 90.7,88 91.4,87.3 100.95,87.3 100.95,93.55 88.7,93.55 88.7,92.55 89.45,91.8 97.2,91.8 97.2,89.05 87.95,89.05
FMU_VDD_3V3 on Top Layer (solid, remove dead copper, pour order 272): 87.95,99.55 88.1,99.7 89.2,99.7 89.8,100.3 100.6,100.3 100.85,100.55 101.35,100.55 101.35,100.15 101.2,100 101.2,99.6 100.1,98.5 87.95,98.5
FMU_VDD_3V3 on Top Layer (solid, remove dead copper, pour order 280): 98.45,104.8 100.8,104.8 100.85,104.75 100.85,104.55 101,104.4 102.7,104.4 102.7,103.4 102.8,103.3 102.9,103.3 102.9,100.15 100.8,100.15 100.8,102.75 100.6,102.95 100,102.95 99.4,103.55 98.55,103.55 98.45,103.65
GND on Top Layer (solid, pour order 356): 98.45,106.3 100.85,106.3 100.85,105.65 101,105.5 104.7,105.5 104.7,104.6 101.05,104.6 101.05,104.8 100.8,105.05 98.45,105.05
GND on Top Layer (solid, remove dead copper, pour order 152): 77.2,78.8 113.2,78.8 113.2,114.8 77.2,114.8
VDD_5V_IN on 3 (solid, remove dead copper): 94.4,110.8 100.3,110.8 100.3,109.35 100.2,109.35 100.1,109.45 94.4,109.45 94.3,109.55 94.3,110.7
VDD_5V_IN on 3 (solid, remove dead copper): 100.2,100.8 102.2,100.8 102.2,102.35 102.4,102.55 106.2,102.55 106.2,107.3 102.7,110.8 100.2,110.8
GND on 3 (solid, remove dead copper): 77.2,114.797 113.2,114.797 113.2,78.797 77.2,78.797 77.2,114.747
GND on 2 (solid, remove dead copper): 77.2,114.75 77.2,114.8 113.2,114.8 113.2,78.8 77.2,78.8
FMU_VDD_3V3 on 2 (solid, remove dead copper): 94.45,100.3 98.2,100.3 98.2,87.3 94.45,87.3

## Keep-outs
Board Outline Layer:
  lines w0.1: 77.2,78.797 77.2,114.797 113.2,114.797 113.2,78.797 77.2,78.797
  lines w0.254: 77.2,107.1 77.2,109.1 ; 77.2,107.1 80.35,107.1 ; 77.2,107.1 77.2,109.1 ; 77.2,107.1 80.35,107.1 ; 77.2,109.1 80.35,109.1 ; 77.2,109.1 80.35,109.1 ; 80.35,107.1 80.35,109.1 ; 80.35,107.1 80.35,109.1 ; 85.95,94.8 85.95,89.55 87.95,89.55 87.95,95.8 85.35,95.8 85.32,95.77 85.32,94.8 85.95,94.8 ; 85.95,94.8 85.95,94.8 ; 97.9,103.5 96.15,103.5 96.15,102.65 95.7,102.65 95.7,100.4 97.9,100.4 97.9,103.5 ; 97.9,103.5 97.9,103.5 ; 111.1,94.1 111.1,108.7 ; 111.1,94.1 113.2,94.1 ; 111.1,94.1 111.1,108.7 ; 111.1,94.1 113.2,94.1 ; 111.1,94.1 111.1,108.7 ; 111.1,94.1 113.2,94.1 ; 111.1,94.1 111.1,108.7 ; 111.1,94.1 113.2,94.1 ; 111.1,108.7 113.2,108.7 ; 111.1,108.7 113.2,108.7 ; 111.1,108.7 113.2,108.7 ; 111.1,108.7 113.2,108.7 ; 113.2,94.1 113.2,108.7 ; 113.2,94.1 113.2,108.7 ; 113.2,94.1 113.2,108.7 ; 113.2,94.1 113.2,108.7 ; 77.2,84.45 77.2,86.5 80.35,86.5 80.35,84.45 77.2,84.45 ; 77.2,94.3 77.2,96.35 80.35,96.35 80.35,94.3 77.2,94.3 ; 77.2,97.3 77.2,99.2 80.3,99.2 80.3,97.3 77.2,97.3 ; 77.2,98.425 77.2,100.475 80.35,100.475 80.35,98.425 77.2,98.425 ; 77.9,86.9 78.8,86.9 78.8,87.85 77.9,87.85 77.9,86.9 ; 77.9,90.7 79.3,90.7 79.3,92.9 77.9,92.9 77.9,90.7 ; 80.95,86.8 80.95,87.75 82.9,87.75 82.9,86.8 80.95,86.8 ; 80.95,102.1 80.95,103 82.95,103 82.95,102.1 80.95,102.1 ; 80.95,105.85 80.95,106.75 82.95,106.75 82.95,105.85 80.95,105.85 ; 81.2,95.7 81.2,96.4 82.7,96.4 82.7,95.7 81.2,95.7 ; 81.95,83.55 83.45,83.55 83.45,85.05 81.95,85.05 81.95,83.55 ; 81.95,108.55 83.45,108.55 83.45,110.05 81.95,110.05 81.95,108.55 ; 82.777,79.053 91.627,79.053 91.627,81.453 90.627,81.453 90.627,83.853 83.777,83.853 83.777,81.453 82.777,81.453 82.777,79.053 ; 82.825,111.65 82.825,114.797 84.875,114.797 84.875,111.65 82.825,111.65 ; 82.95,111.7 82.95,114.8 84.947,114.8 84.9,114.797 84.9,111.7 82.95,111.7 ; 83.4,105.3 84.65,105.3 84.65,106.1 83.4,106.1 83.4,105.3 ; 83.55,108.6 83.55,109.5 84.5,109.5 84.5,108.6 83.55,108.6 ; 83.65,86.3 83.65,90.35 87.7,90.35 87.7,86.3 83.65,86.3 ; 83.85,95.65 83.85,98.75 84.45,99.35 87.55,99.35 87.55,95.65 83.85,95.65 ; 83.85,99.1 88.3,99.1 88.3,100.25 83.85,100.25 83.85,99.1 ; 84.1,88.85 85,88.85 85,89.8 84.1,89.8 84.1,88.85 ; 84.5,84.05 85.45,84.05 85.45,84.95 84.5,84.95 84.5,84.05 ; 84.65,93.1 84.65,94 85.6,94 85.6,93.1 84.65,93.1 ; 84.65,93.35 84.65,95.65 86.65,95.65 86.65,93.35 84.65,93.35 ; 85.25,109.05 86.6,109.05 86.55,111.05 85.25,111.05 85.25,109.05 ; 85.55,90.35 85.55,92.15 87.05,92.15 87.05,90.35 85.55,90.35 ; 85.55,107.2 86.35,107.2 86.35,107.4 86.7,107.4 86.7,108.05 85.55,108.05 85.55,107.2 ; 86.65,106.55 86.65,107.75 88.05,107.75 88.05,106.55 86.65,106.55 ; 88,79.45 88.3,79.15 90.1,79.15 90.3,79.35 91.4,79.35 91.4,81.25 90.1,81.25 90.1,80.2 90.05,80.15 88.3,80.15 88,79.85 88,79.45 ; 89.2,95.55 89.2,99.55 91.1,99.55 91.1,99.35 91.3,99.35 91.3,99.55 92,99.55 92,99.25 93.2,99.25 93.2,95.55 91.3,95.55 91.3,95.75 91.1,95.75 91.1,95.55 90.8,95.55 90.8,95.75 90.6,95.75 90.6,95.55 89.2,95.55 ; 89.25,99.85 90.2,99.85 90.2,100.75 89.25,100.75 89.25,99.85 ; 89.825,89.25 89.825,91.15 90.775,91.15 90.775,89.25 89.825,89.25 ; 90.3,111.7 90.3,114.8 92.25,114.797 92.25,111.7 90.3,111.7 ; 90.4,81.9 90.4,84.6 92.15,84.6 92.15,81.9 90.4,81.9 ; 90.65,100.3 90.65,102.7 92.25,102.7 92.25,100.3 90.65,100.3 ; 91.1,91.9 91.1,93.8 93.25,93.8 93.25,91.9 91.1,91.9 ; 91.2,108.825 92.1,108.825 92.1,109.775 91.2,109.775 91.2,108.825 ; 91.425,111.65 91.425,114.797 93.6,114.8 93.6,111.65 91.425,111.65 ; 91.85,78.8 93.85,78.8 93.85,81.95 91.85,81.95 91.85,78.8 ; 91.95,105.35 91.95,105.55 93.95,105.55 93.95,108.25 97,108.25 97,106.35 96,105.35 91.95,105.35 ; 92,99.9 92,100.75 94.1,100.75 94.1,99.9 92,99.9 ; 92.35,83.9 93.2,83.9 93.2,84.7 92.35,84.7 92.35,83.9 ; 93,109.125 93,110.475 94.1,110.475 94.1,109.125 93,109.125 ; 94.55,113.4 95.85,113.4 95.85,114.65 94.55,114.65 94.55,113.4 ; 95,107.9 95.9,107.9 95.9,108.85 95,108.85 95,107.9 ; 95.8,97.2 95.8,99.8 97.6,99.8 97.6,97.8 97.6,97.2 95.8,97.2 ; 95.8,111.65 95.8,114.797 97.8,114.797 97.8,111.65 95.8,111.65 ; 96.7,112.55 96.7,114.797 98.05,114.797 98.05,112.55 96.7,112.55 ; 99.4,97.2 99.4,99.8 101.2,99.8 101.2,97.2 99.4,97.2 ; 99.65,85.35 100.25,85.35 100.25,87.5 99.7,87.5 99.65,87.45 99.65,85.35 ; 100.45,82.55 100.45,84.55 101.35,84.55 101.35,82.55 100.45,82.55 ; 100.45,108.8 102.95,108.8 102.95,111.05 100.45,111.05 100.45,108.8 ; 100.95,98.35 104.4,98.35 104.4,99.6 101.2,99.6 100.95,99.35 100.95,98.35 ; 101.6,92.2 101.95,92.2 101.95,94.7 101.6,94.7 101.6,92.2 ; 102.15,84.85 102.15,86.75 103.1,86.75 103.1,85.75 103.1,84.85 102.15,84.85 ; 102.7,92.2 103.05,92.2 103.05,94.7 102.7,94.7 102.7,92.2 ; 103.6,96.65 103.6,97.95 105.05,97.95 105.05,96.65 103.6,96.65 ; 103.95,87.05 103.95,88.25 104.4,88.25 104.4,89.85 103.95,89.85 103.95,92.45 106.8,92.45 106.8,89.85 106.55,89.85 106.55,88.25 106.8,88.25 106.8,87.05 103.95,87.05 ; 104.2,82.55 104.2,84.55 105.1,84.55 105.1,82.55 104.2,82.55 ; 104.4,95.6 104.4,96.5 105.35,96.5 105.35,95.6 104.4,95.6 ; 105.45,78.8 107.45,78.8 107.45,81.95 105.45,81.95 105.45,78.8 ; 105.6,111.65 105.6,114.797 107.65,114.797 107.65,111.65 105.6,111.65 ; 105.9,81.9 105.9,84.6 107.65,84.6 107.65,81.9 105.9,81.9 ; 105.9,91.9 105.9,93.8 107.65,93.8 107.65,91.9 105.9,91.9 ; 106.45,109.05 107.95,109.05 107.95,110.55 106.45,110.55 106.45,109.05 ; 106.95,84.55 108.45,84.55 108.45,86.05 106.95,86.05 106.95,84.55 ; 107.3,86.3 107.3,87.35 109.3,87.35 109.3,86.3 107.3,86.3 ; 107.45,90.45 107.45,91.4 109.7,91.4 109.7,90.45 107.45,90.45 ; 110.05,84.35 110.05,86.4 113.2,86.4 113.2,84.35 110.05,84.35 ; 110.05,91.7 110.05,93.75 113.2,93.75 113.2,91.7 110.05,91.7 ; 111.05,84.681 111.05,86.381 113.2,86.381 113.2,84.681 111.05,84.681 ; 111.05,92.25 111.05,93.95 113.2,93.95 113.2,92.25 111.05,92.25

## Silkscreen, mask and mechanical layers (free items; w line width, h text height)
Top Silkscreen Layer:
  circle w0.1: c79.95,112.05 r3
  circle w0.1: c110.45,112.05 r3
  circle w0.1: c110.45,81.55 r3
  circle w0.1: c79.95,81.55 r3
  region: 92.9,111.8 93,111.8 93,110.8 92.9,110.8
  region: 80.95,97.4 82.2,98.65 82.2,96.15
  region: 92.4,110.8 92.4,111.8 92.9,111.3
  region: 77.7,97.65 77.45,97.4 77.95,97.4
  lines w0.15: 93.6,103.95 93.6,106.15 ; 96.8,103.95 96.8,106.15 ; 99.625,103.975 99.625,106.15 ; 100.95,103.95 100.95,106.15 ; 104.35,86.95 106.55,86.95 ; 104.35,91.15 106.55,91.15
  text "ESP8266" at 97,110.25 h0.7
  text "OSD" at 82.2,108.8 h0.75
  text "RC" at 82.25,108.15 h0.75 r270
  text "3V3" at 101.6,102.05 h0.5 r270
  text "XRacer" at 86.6,101.1 h1.52 r45
  text "flight" at 82.55,97 h1.25
  text "TL2" at 82.4,96 h0.75 r270
  text "27092015-2345" at 89.45,93.3 h0.75
  text "auav.co" at 83.2,91.2 h1.75 r270
  text "CAN" at 108.15,84.55 h0.75 r90
  text "TL1" at 105.45,83.8 h0.75
Bottom Silkscreen Layer:
  circle w0.1: c79.95,81.55 r3
  circle w0.1: c110.45,81.55 r3
  circle w0.1: c110.45,112.05 r3
  circle w0.1: c79.95,112.05 r3
  region: 105.15,94.35 105.75,94.35 105.75,92.35 105.15,92.35
  text "BTBZ" at 93.95,108.85 h0.75
  text "PWR" at 97.75,108.85 h0.75
  text "G+S" at 108.65,108.85 h0.75
  text "3V3" at 85.85,108.2 h0.5
  text "6" at 105.8,107.55 h0.75
  text "5V-IN" at 102.2,106.45 h0.5 r270
  text "5" at 105.8,104.95 h0.75
  text "3V3" at 85.85,104.45 h0.5
  text "4" at 105.8,102.4 h0.75
  text "C2" at 85.45,100.05 h0.5
  text "3" at 105.8,99.9 h0.75
  text "C14" at 94.75,98.8 h0.5 r45
  text "N.Arsov &" at 89.1,98.7 h1.5 r90
  text "XRacer V1.0" at 83.65,98.45 h1.5 r90
  text "C15" at 95.3,98.25 h0.5 r45
  text "2" at 105.8,97.3 h0.75
  text "GPS" at 79.7,96.3 h0.75
  text "D15" at 87.9,95.1 h0.5
  text "1" at 105.8,94.8 h0.75
  text "P.Kocmoud" at 91.35,93.3 h1.45 r90
  text "A6" at 86.35,92.3 h0.5
  text "E15" at 83.2,89.9 h0.5 r90
  text "E12" at 89.55,87.85 h0.5
  text "A5" at 86.05,85.75 h0.5
  text "A7" at 88.3,85.75 h0.5
  text "arsovtech.com" at 87.35,84.7 h1.52
Top Solder Mask Layer:
  circle w0.35: c101.85,102.65 r0.17
Bottom Solder Mask Layer:
  circle w0.5: c102.5,105.85 r0.25
Mechanical Layer:
  drawing of 472 lines, arcs and shapes, not listed